# Altium PCB extender.PcbDoc
Units mil, origin at the board's own origin, x right, y up, seen from the top; angles counter-clockwise.
Board outline 525 x 515 mil, 2 copper layers (Top Layer, Bottom Layer); 14 components, 7 nets, 29 pads, 0 vias.
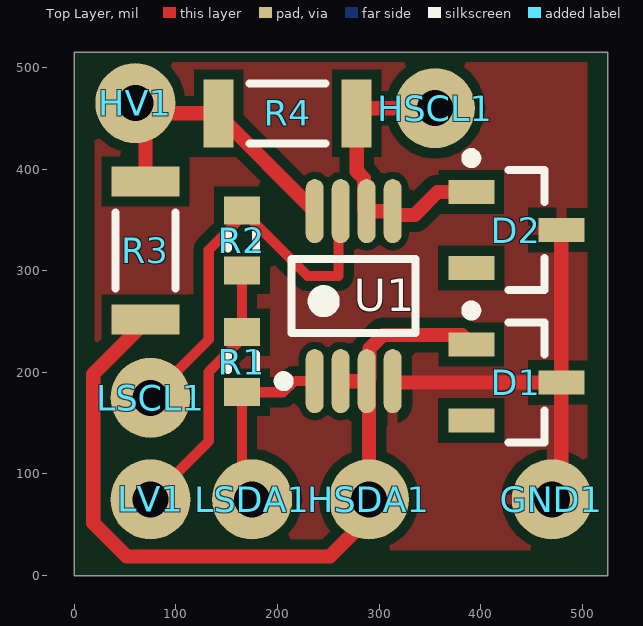
[diagram p0: Top Layer view]
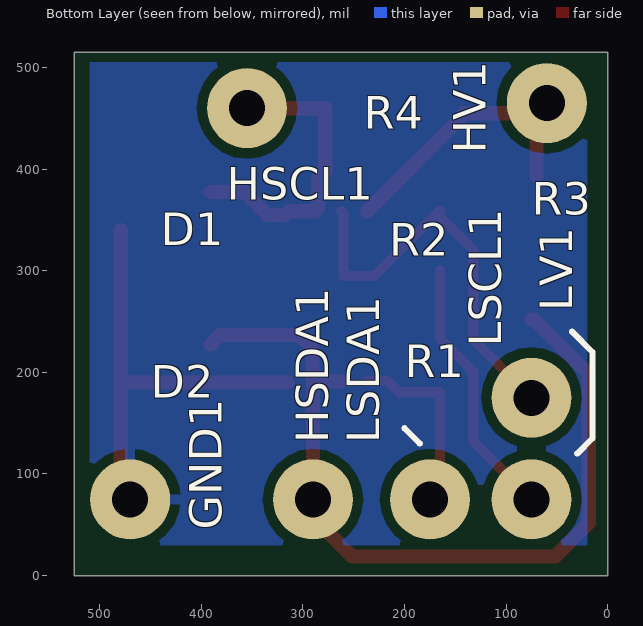
[diagram p1: Bottom Layer view, seen from below]

## Layer stack, top to bottom
Top Layer: signal copper 1.4
Dielectric: dielectric 12.6, FR-4, Dk 4.8
Bottom Layer: signal copper 1.4

## Board outline
0,0 0,515 525,515 525,0

## Design rules (kind name [scope] priority, off if disabled: settings)
Clearance Clearance_VSSOP [HasFootprint('8VSSOP')] p1: gap=7
Clearance [All] p2: gap=10
MinimumSolderMaskSliver MinimumSolderMaskSliver_vssop [HasFootprint('8VSSOP')] p1: minsoldermaskwidth=5.5
MinimumSolderMaskSliver [All] p2: minsoldermaskwidth=10
PolygonConnect [All] p1: connectstyle=Relief reliefconductorwidth=10 reliefentries=4 polygonreliefangle="90 Angle" airgapwidth=10
RoutingVias [All] p1: holewidth=28 width=50 viastyle="Through Hole" minholewidth=28 minwidth=45 maxholewidth=28 maxwidth=50
SilkToSolderMaskClearance SilkToSolderMaskClearance_0603 [HasFootprint('J1-0603')] p1: minsilkscreentomaskgap=0 clearancetoexposedcopper=TRUE
SilkToSolderMaskClearance [IsPad] p2: minsilkscreentomaskgap=10 clearancetoexposedcopper=TRUE
SolderMaskExpansion [All] p1: expansion=4
Width Width_hc [InNetClass('hc')] p1: maxlimit=9999 minlimit=14 preferedwidth=14
Width [All] p2: maxlimit=9999 minlimit=10 preferedwidth=10
26 further rules are at their usual default settings.

## Classes and differential pairs
net class hc: NetD1_1 NetD2_1 NetHV1_1

## Components (designator, comment, footprint, x,y, rotation, side; value= is the part's Value field where it differs from the comment)
D1 "BAT54A" SOT-23_N 435,190 r0 top
D2 "BAT54A" SOT-23_N 435,340 r0 top
GND1 "GND" PIN1 470,75 r90 top
HSCL1 "SCL" PIN1 355,460 r90 top
HSDA1 "SDA" PIN1 290,75 r90 top
HV1 "5V" PIN1 60,465 r0 top
LSCL1 "SCL" PIN1 75,175 r90 top
LSDA1 "SDA" PIN1 175,75 r90 top
LV1 "5V" PIN1 75,75 r0 top
R1 "1.2k" J1-0603 165,210 r90 top
R2 "1.2k" J1-0603 165,330 r270 top
R3 "330" R1206 70,320 r90 top
R4 "330" R1206 210,455 r180 top
U1 "P82B96" 8VSSOP 275,275 r90 top

## Footprints (in the part's own frame and the unit in brackets; to place one, negate y for a bottom-side part, rotate by r counter-clockwise, add the part's x,y. Pads: shape width x height; smd on the part's side, far side on the other; paste and mask are expansions set on the pad)
8VSSOP [mm] "VSSOP, 8-Leads, Body 3.00x3.00mm, Pitch 0.65mm, IPC Medium Density"
  oval 1.6x0.45 smd paste+0 mask+0.03: 1(-2.125,0.975) 2(-2.125,0.325) 3(-2.125,-0.325)
  oval 1.6x0.45 smd mask+0.03: 4(-2.125,-0.975) 5(2.125,-0.975) 6(2.125,-0.325) 7(2.125,0.325) 8(2.125,0.975)
  silkscreen extent -2.25,-1.55 0.92,1.87, body extent -1.55,-1.55 1.55,1.55, height 1.1
J1-0603 [mm] "Chip Resistor, Body 1.6x0.8mm, IPC High Density"
  rect 0.7x0.9 smd: 1(-0.75,0) 2(0.75,0)
  silkscreen extent -0.2,-0.35 0.2,0.35, body extent -0.85,-0.48 0.85,0.48, height 0.9
PIN1 [mm] "Connector; Plug"
  round 2 hole 0.9: 1(0,0)
R1206 [mm] "Chip Resistor, 2-Leads, Body 3.20x1.60mm, IPC Medium Density"
  rect 0.75x1.7 smd: 1(-1.725,0) 2(1.725,0)
  silkscreen extent -0.95,-0.75 0.95,0.75, body extent -1.6,-0.8 1.6,0.8, height 0.6
SOT-23_N [mm] "SOT23, 3-Leads, Body 2.9x1.3mm, Pitch 0.95mm, Lead Span 2.5mm, IPC Medium Density"
  rect 1.15x0.6 smd: 1(-1.125,0.95) 2(-1.125,-0.95) 3(1.125,0)
  silkscreen extent -1.25,-1.5 0.7,1.92, body extent -0.7,-1.5 0.7,1.5, height 1.1

## Part data
D1 D2: library part Diode, "Default Diode"
GND1 HSCL1 HSDA1 HV1 LSCL1 LSDA1 LV1: library part Socket, "Socket"
R1 R2 R3 R4: library part Res3, "Resistor"

## Nets (pads, with @x,y where several pads share a name; then routed paths per layer and width w, separated by ;. In a path a pad name is that pad's centre, name@x,y a point inside that pad or via, vN(x,y) a via of type N, cw(c..) or ccw(c..) an arc to the next point about the centre after c; other vN are vias at no path point)
NetD1_1: D1.1 HSDA1.1 R3.1 U1.2 U1.3 | length 829.8
  Top Layer w14: R3.1@75,252.09 72.37,252.09 18.63,198.35 18.63,51.65 51.65,18.63 251.37,18.63 290,57.26 HSDA1.1 290,189.13 U1.3 ; U1.2 U1.3 ; D1.1 381.28,236.83 303.92,236.83 290.53,223.44 290.53,194.07 U1.3
NetD1_3: D1.3 D2.3 GND1.1 U1.4 | length 435.3
  Top Layer w10: U1.4 U1.4@314.72,190 ; GND1.1 GND1.1@479.29,84.29
  Top Layer w14: U1.4@314.72,190 D1.3 ; GND1.1@479.29,84.29 D1.3 ; D2.3 D1.3
NetD2_1: D2.1 HSCL1.1 R4.1 U1.5 U1.6 | length 291.2
  Top Layer w14: R4.1 277.91,397.92 285.06,390.77 285.06,361.39 U1.6 U1.5 317.05,355 335,355 357.4,377.4 D2.1 ; R4.1@277.91,460 HSCL1.1
NetHV1_1: HV1.1 R3.2 R4.2 U1.8 | length 269.7
  Top Layer w14: R3.2@70,392.91 70,455 R4.2 142.09,453.19 U1.8
NetLSCL1_1: LSCL1.1 R2.1 U1.7 | length 408.1
  Top Layer w10: LSCL1.1 132.28,232.28 132.28,320.47 165,353.18 R2.1 229.53,295 260,295 260,356.46 U1.7
NetLSDA1_1: LSDA1.1 R1.1 U1.1 | length 185.7
  Top Layer w10: LSDA1.1 165,85 R1.1 205.47,180.47 216.34,191.34 U1.1
NetLV1_1: LV1.1 R1.2 R2.2 | length 262.8
  Top Layer w10: LV1.1 132.28,132.28 132.28,200.47 165,233.18 R1.2 R2.2
pads on no net: D1.2 D2.2

## Polygon pours and split planes (outlines as drawn)
NetD1_3 on Top Layer "Top Layer-No Net" (solid, pour order 2): 20,505 20,25 510,25 505,25 505,505
NetD1_3 on Bottom Layer "Top Layer-No Net" (solid, pour order 4): 20,505 20,30 510,30 510,505

## Silkscreen, mask and mechanical layers (free items; w line width, h text height)
Bottom Overlay:
  lines w6: 30,120 15,135 15,220 35,240 ; 185,130 200,145
Mechanical 1:
  the board outline again, w47.24